# EAGLE board Robot Motor Car (EAGLE 9.7.0)

Size 216.01 x 132.23 mm. Coordinates in mm from the lower left corner, seen from the top.
Outline: 0,0 216.01,0 216.01,132.23 0,132.23 0,0
Copper layers (1*16): Top 0.035mm / dielectric 1.5mm / Bottom 0.035mm
Design rules "default": minimum track width 6mil, minimum drill 0.35mm, track to track 6mil, track to pad 6mil, pad to pad 6mil, via to via 6mil, smd to smd 6mil, copper to edge 40mil, drill to drill 6mil, minimum pad ring 10mil, minimum via ring 8mil, stop-mask expansion 4mil, vias tented up to drill 0mil, thermal gap 10mil

## Footprints (pad centres in the part's own frame; a part is rotated, then mirrored left to right if it is on the bottom)
BATTERY-GENERIC = drill 1.118 pad 3.15 octagon: + 2.54,0; - -2.54,0
DG01D = drill 1.118 pad 3.15 octagon: + 2.54,0; - -2.54,0
28015 = drill 1.016 long: 1 -2.54,0; 2 0,0; 3 2.54,0
DIP762W53P254L1969H508Q16B = drill 0.743 pad 1.343: 1 -3.81,8.89; 2 -3.81,6.35; 3 -3.81,3.81; 4 -3.81,1.27; 5 -3.81,-1.27; 6 -3.81,-3.81; 7 -3.81,-6.35; 8 -3.81,-8.89; 9 3.81,-8.89; 10 3.81,-6.35; 11 3.81,-3.81; 12 3.81,-1.27; 13 3.81,1.27; 14 3.81,3.81; 15 3.81,6.35; 16 3.81,8.89
ARDUINO-UNO-R3-SHIELD = drill 1.016 pad 1.88: 3.3V 24.13,-2.54; 5V 24.13,0; A0 24.13,12.7; A1 24.13,15.24; A2 24.13,17.78; A3 24.13,20.32; A4 24.13,22.86; A5 24.13,25.4; AREF -24.13,-13.97; D2 -24.13,20.32; D3 -24.13,17.78; D4 -24.13,15.24; D5 -24.13,12.7; D6 -24.13,10.16; D7 -24.13,7.62; D8 -24.13,3.81; D9 -24.13,1.27; D10 -24.13,-1.27; D11 -24.13,-3.81; D12 -24.13,-6.35; D13 -24.13,-8.89; GND@0 24.13,2.54; GND@1 24.13,5.08; GND@2 -24.13,-11.43; IOREF 24.13,-7.62; NC 24.13,-10.16; RES 24.13,-5.08; RX -24.13,25.4; SCL -24.13,-19.05; SDA -24.13,-16.51; TX -24.13,22.86; VIN 24.13,7.62

## Placement (x,y rotation side)
BAT1  9V  [BATTERY-GENERIC]  155.62,123.94 270 top
M1  MOTOR_DG01D  [DG01D]  74.3,12.88 270 top
M2  MOTOR_DG01D  [DG01D]  74.51,119.47 270 top
M3  MOTOR_DG01D  [DG01D]  133.02,12.7 270 top
M6  MOTOR_DG01D  [DG01D]  132.18,119.53 270 top
PING2  DISTANCE-SENSOR-3PIN  [28015]  45.98,77.9 90 top
U4  L293E  [DIP762W53P254L1969H508Q16B]  74.34,75.47 90 top
U5  L293E  [DIP762W53P254L1969H508Q16B]  107.36,75.47 90 top
U6  ARDUINO-UNO-R3-SHIELD  [ARDUINO-UNO-R3-SHIELD]  186.17,71.36 0 top

## Library data of the parts
BAT1 M1-M3 M6 PING2 U4-U6 = Tinkercad

## Nets
BAT1+: BAT1.+ U4.8 U5.8
BAT1-: BAT1.- PING2.1 U4.4 U4.5 U4.12 U4.13 U5.4 U5.5 U5.12 U5.13 U6.GND@0 U6.GND@1 U6.GND@2
M1_+: M1.+ U4.6
M1_-: M1.- U4.3
M2_+: M2.+ U4.11
M2_-: M2.- U4.14
M3_+: M3.+ U5.6
M3_-: M3.- U5.3
M6_+: M6.+ U5.11
M6_-: M6.- U5.14
U6_5V: PING2.2 U4.16 U5.16 U6.5V
U6_D2: U4.2 U5.2 U6.D2
U6_D3: U4.7 U5.7 U6.D3
U6_D4: U4.15 U5.15 U6.D4
U6_D5: U4.10 U5.10 U6.D5
U6_D6: U4.9 U5.9 U6.D6
U6_D10: U4.1 U5.1 U6.D10
U6_D11: PING2.3 U6.D11

## Tracks (layer width: path | path; a pad name or v marks a point on that pad's centre or on a via)
BAT1+  (2 unrouted)
BAT1-  (12 unrouted)
M1_+  (1 unrouted)
M1_-  (1 unrouted)
M2_+  (1 unrouted)
M2_-  (1 unrouted)
M3_+  (1 unrouted)
M3_-  (1 unrouted)
M6_+  (1 unrouted)
M6_-  (1 unrouted)
U6_5V  (3 unrouted)
U6_D2  (2 unrouted)
U6_D3  (2 unrouted)
U6_D4  (2 unrouted)
U6_D5  (2 unrouted)
U6_D6  (2 unrouted)
U6_D10  (2 unrouted)
U6_D11  (1 unrouted)